# Altium PCB atWork_Remote.PcbDoc
Units mm, origin at the board's own origin, x right, y up, seen from the top; angles counter-clockwise.
Board outline 138.68 x 103 mm, 2 copper layers (Top Layer, Bottom Layer); 75 components, 79 nets, 284 pads, 95 vias.
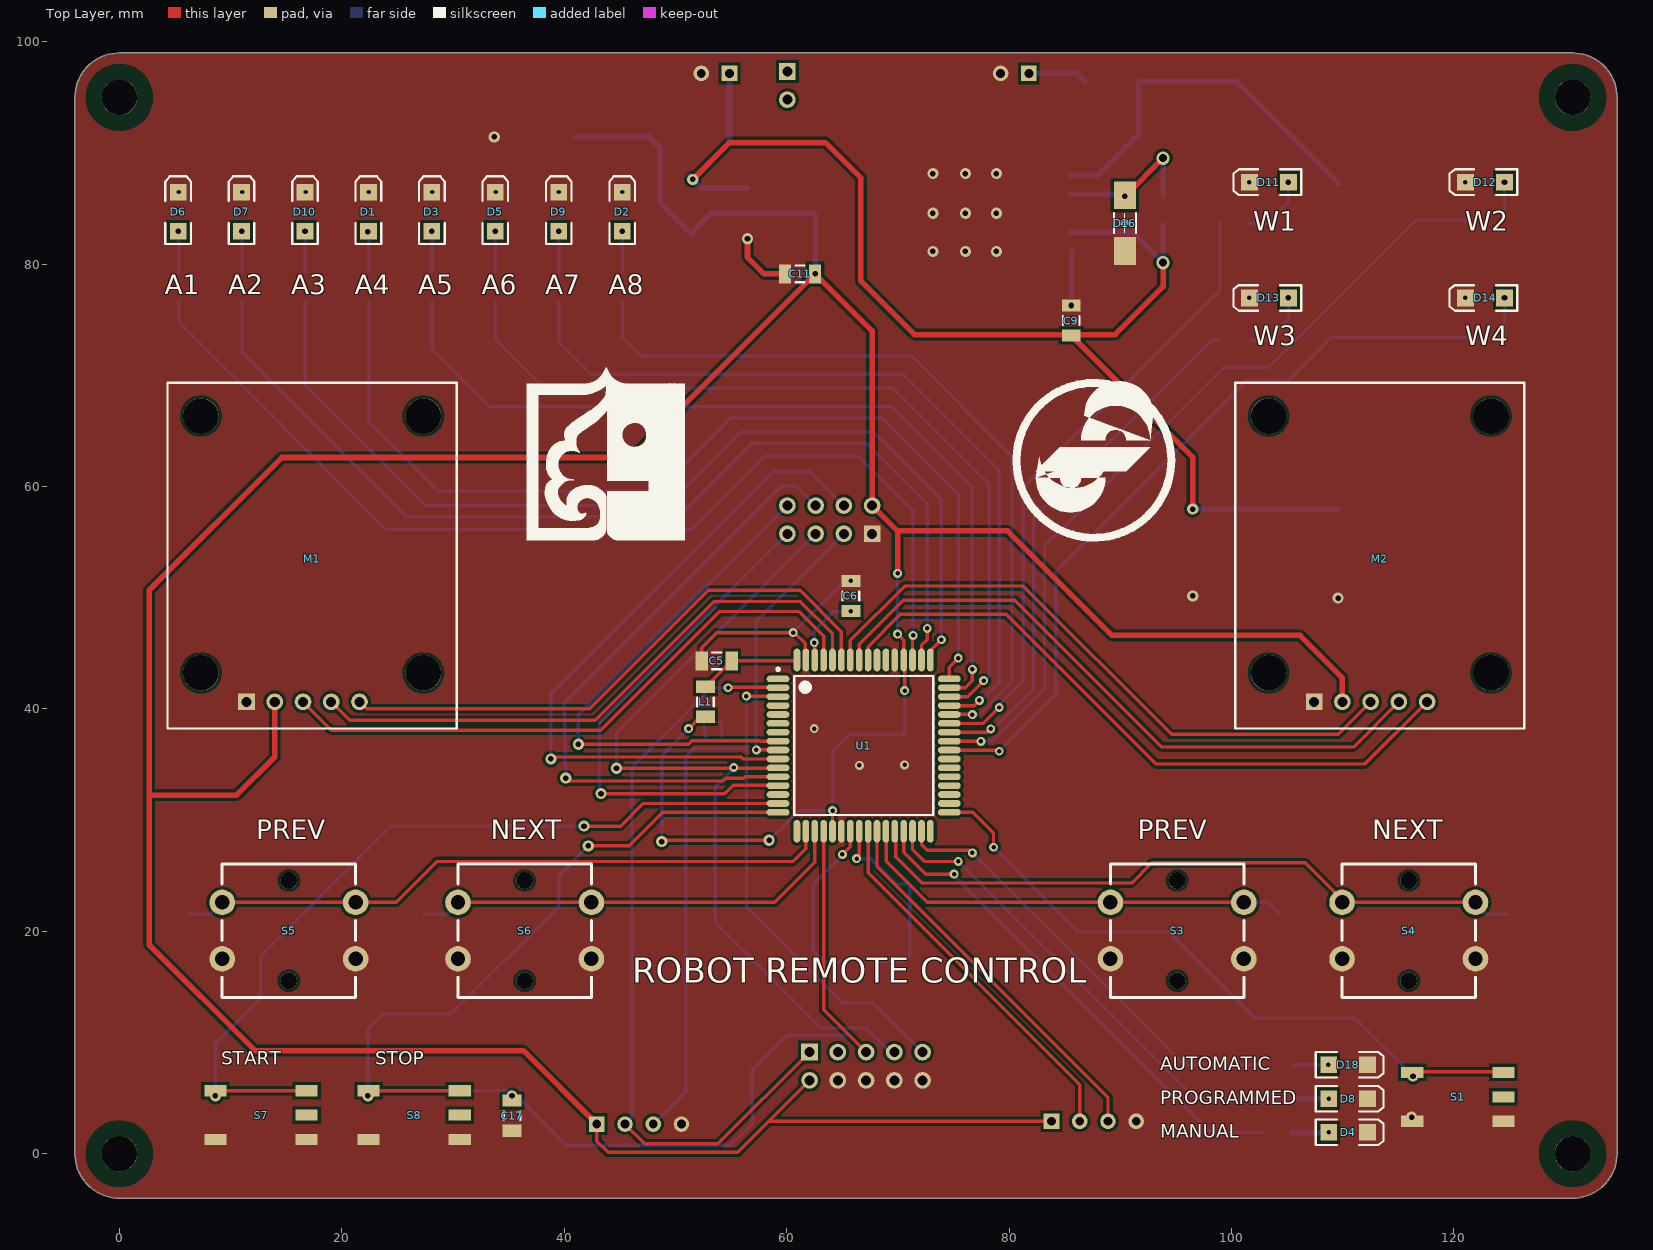
[diagram p0: Top Layer view]
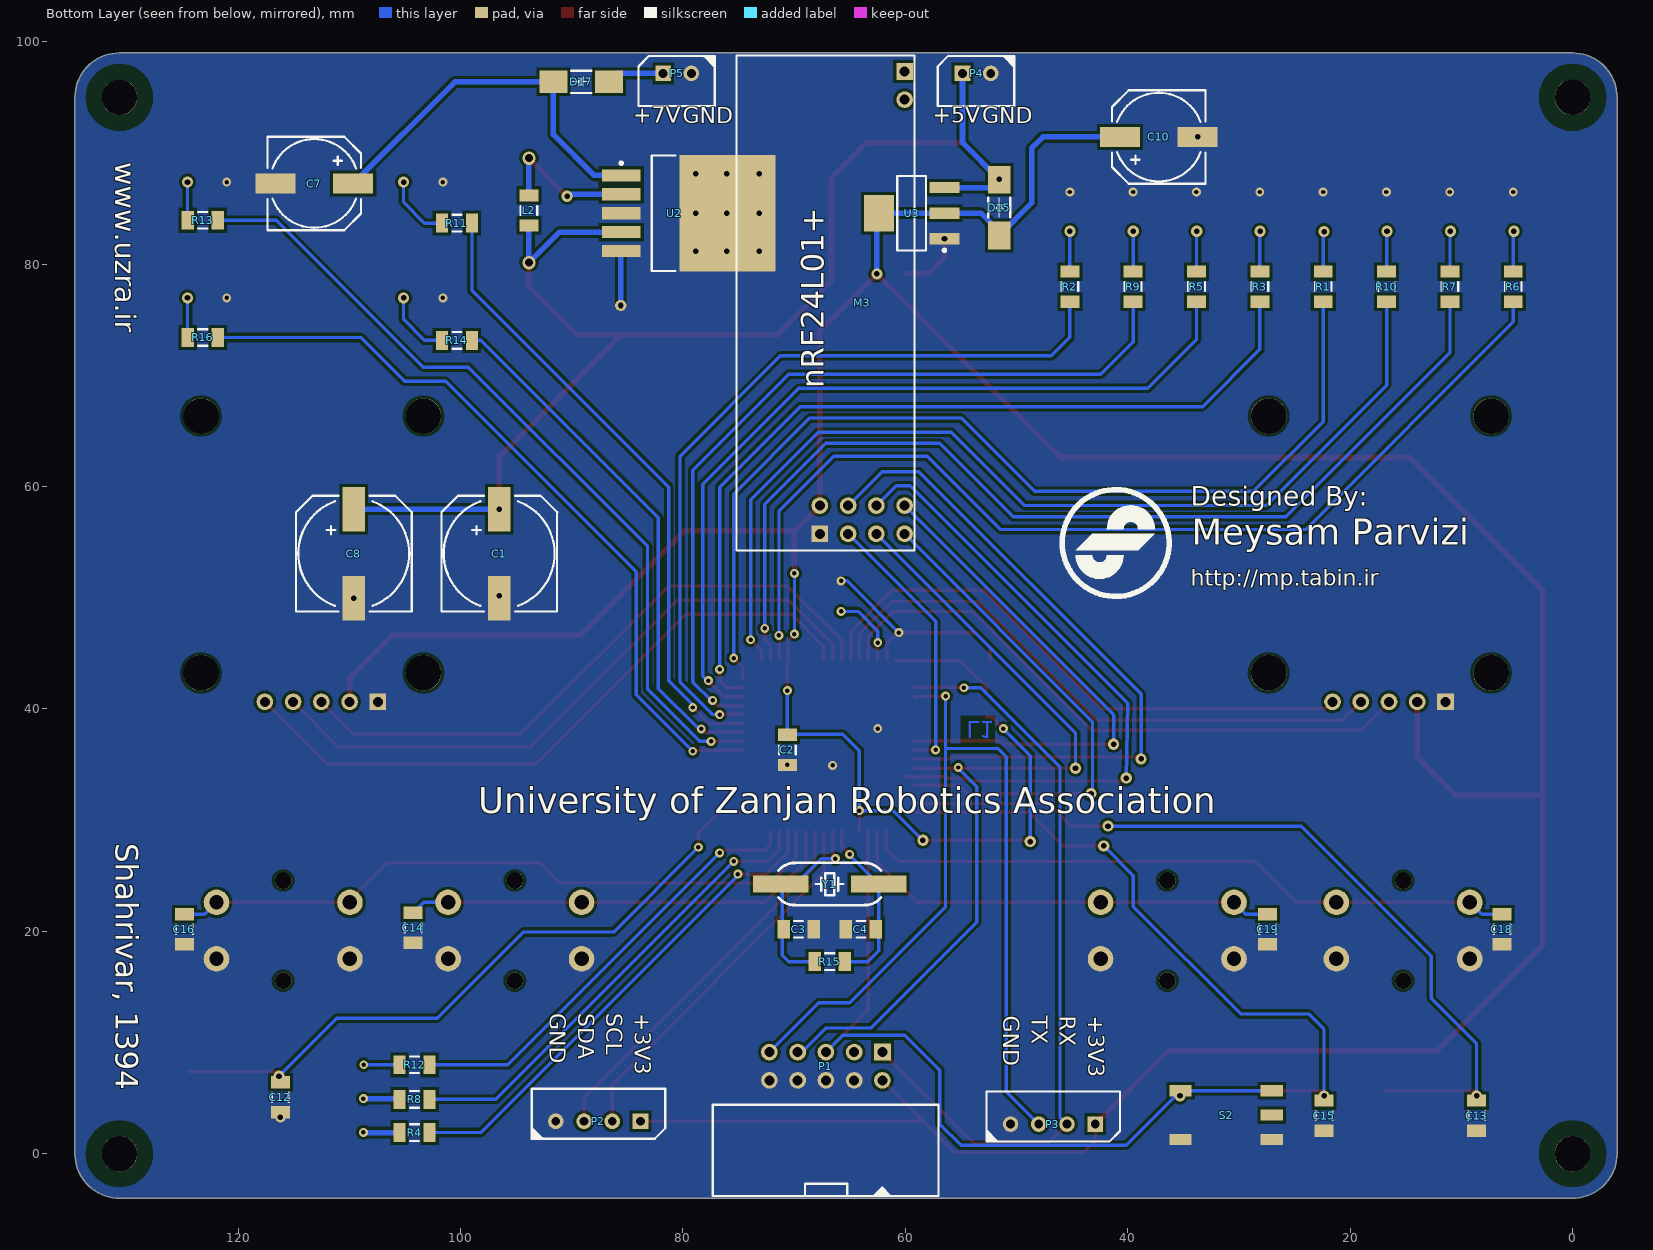
[diagram p1: Bottom Layer view, seen from below]

## Layer stack, top to bottom
Top Solder: solder mask 0.0102, Solder Resist, Dk 3.5
Top Layer: signal copper 0.0356
Dielectric 1: dielectric 0.32, FR-4, Dk 4.8
Bottom Layer: signal copper 0.0356
Bottom Solder: solder mask 0.0102, Solder Resist, Dk 3.5

## Board outline
-4,0 -4,94.996 cw(c0,94.996) 0,98.996 130.683,98.996 cw(c130.683,94.996) 134.683,94.996 134.683,0 cw(c130.683,0) 130.683,-4 0,-4 cw(c0,0)

## Design rules (kind name [scope] priority, off if disabled: settings)
Clearance [All] p1: gap=0.254
PolygonConnect [All] p1: connectstyle=Direct reliefconductorwidth=0.254 reliefentries=4 polygonreliefangle="90 Angle" airgapwidth=0.254
RoutingVias [All] p1: holewidth=0.711 width=1.27 viastyle="Through Hole" minholewidth=0.711 minwidth=1.27 maxholewidth=0.711 maxwidth=1.27
SolderMaskExpansion [All] p1: expansion=0.102
Width [All] p1: maxlimit=1 minlimit=0.254 preferedwidth=0.4 minimp=50.000000 maximp=50.000000 favimp=50.000000
30 further rules are at their usual default settings.

## Components (designator, comment, footprint, x,y, rotation, side; value= is the part's Value field where it differs from the comment)
C1 "Cap Pol1" CAP-SMD2 96.52,53.975 r90 bottom
C2 "Cap" C1206 70.612,36.322 r90 bottom
C3 "Cap" C1206 69.596,20.193 r0 bottom
C4 "Cap" C1206 64.008,20.193 r180 bottom
C5 "Cap" C1206 53.721,44.323 r0 top
C6 "Cap" C1206 65.786,50.165 r270 top
C7 "Cap Pol1" CAP-SMD1 113.157,87.249 r180 bottom
C8 "Cap Pol1" CAP-SMD2 109.601,53.975 r90 bottom
C9 "Cap" C1206 85.598,74.93 r270 top
C10 "Cap Pol1" CAP-SMD1 37.211,91.44 r0 bottom
C11 "Cap" C1206 61.214,79.121 r0 top
C12 "Cap" C1206 116.205,5.08 r270 bottom
C13 "Cap" C1206 8.636,3.429 r270 bottom
C14 "Cap" C1206 104.267,20.32 r270 bottom
C15 "Cap" C1206 22.352,3.429 r270 bottom
C16 "Cap" C1206 124.841,20.193 r270 bottom
C17 "Cap" C1206 35.306,3.429 r270 top
C18 "Cap" C1206 6.35,20.193 r270 bottom
C19 "Cap" C1206 27.432,20.193 r270 bottom
D1 "LED2" 3.2X1.6X1.1 22.394,84.709 r90 top
D2 "LED2" 3.2X1.6X1.1 45.212,84.709 r90 top
D3 "LED2" 3.2X1.6X1.1 28.098,84.709 r90 top
D4 "LED2" 3.2X1.6X1.1 110.49,1.926 r0 top
D5 "LED2" 3.2X1.6X1.1 33.803,84.709 r90 top
D6 "LED2" 3.2X1.6X1.1 5.28,84.709 r90 top
D7 "LED2" 3.2X1.6X1.1 10.985,84.709 r90 top
D8 "LED2" 3.2X1.6X1.1 110.49,4.953 r0 top
D9 "LED2" 3.2X1.6X1.1 39.507,84.709 r90 top
D10 "LED2" 3.2X1.6X1.1 16.689,84.709 r90 top
D11 "LED2" 3.2X1.6X1.1 103.378,87.376 r180 top
D12 "LED2" 3.2X1.6X1.1 122.809,87.376 r180 top
D13 "LED2" 3.2X1.6X1.1 103.378,76.962 r180 top
D14 "LED2" 3.2X1.6X1.1 122.809,76.962 r180 top
D15 "Diode 1N4007" DIODE-SMD 51.562,85.09 r90 bottom
D16 "1N5822" DIODE-SMD 90.424,83.693 r90 top
D17 "1N5822" DIODE-SMD 89.154,96.393 r0 bottom
D18 "LED2" 3.2X1.6X1.1 110.49,8.001 r0 top
L1 "Inductor" C1206 52.705,40.64 r270 top
L2 "Inductor" C1206 93.853,84.836 r270 bottom
M1 "Bigtree SJoys" BIGTREE_SJOYS 11.43,40.64 r0 top
M2 "Bigtree SJoys" BIGTREE_SJOYS 107.442,40.64 r0 top
M3 "nRF24L01+" NRF24L01+ 67.691,55.753 r90 bottom
P1 "Programmer" BOX2X5_RIGHT 67.145,6.604 r180 bottom
P2 "I2C" XH4PIN 83.82,2.921 r180 bottom
P3 "UART" XH4PIN 42.926,2.667 r180 bottom
P4 "5V Power" XH2PIN 54.864,97.155 r0 bottom
P5 "Battery Power" XH2PIN 81.788,97.155 r0 bottom
R1 "Res1" C1206 22.425,77.978 r270 bottom
R2 "Res1" C1206 45.212,77.978 r270 bottom
R3 "Res1" C1206 28.121,77.978 r270 bottom
R4 "Res1" C1206 104.14,1.905 r180 bottom
R5 "Res1" C1206 33.818,77.978 r270 bottom
R6 "Res1" C1206 5.334,77.978 r270 bottom
R7 "Res1" C1206 11.031,77.978 r270 bottom
R8 "Res1" C1206 104.14,4.889 r180 bottom
R9 "Res1" C1206 39.515,77.978 r270 bottom
R10 "Res1" C1206 16.728,77.978 r270 bottom
R11 "Res1" C1206 100.33,83.693 r180 bottom
R12 "Res1" C1206 104.14,8.001 r180 bottom
R13 "Res1" C1206 123.19,83.947 r180 bottom
R14 "Res1" C1206 100.33,73.152 r180 bottom
R15 "Res1" C1206 66.802,17.272 r180 bottom
R16 "Res1" C1206 123.19,73.406 r180 bottom
S1 "SW-PB" PUSH1 124.46,2.921 r180 top
S2 "SW-PB" PUSH1 27.051,1.27 r0 bottom
S3 "SW-PB" PUSH-OMRON 95.123,20.066 r180 top
S4 "SW-PB" PUSH-OMRON 115.951,20.066 r180 top
S5 "SW-PB" PUSH-OMRON 15.24,20.066 r180 top
S6 "SW-PB" PUSH-OMRON 36.449,20.066 r180 top
S7 "SW-PB" PUSH1 16.836,1.27 r180 top
S8 "SW-PB" PUSH1 30.607,1.27 r180 top
U1 "ATmega128A-AU" 64A_M 66.929,36.703 r0 top
U2 "LM2576S-5.0" TS5B_M 79.502,84.582 r180 bottom
U3 "LM1117MP-3.3" MP04A_M 59.436,84.582 r0 bottom
Y1 "XTAL" XTAL-SMD 66.802,24.257 r180 bottom

## Footprints (in the part's own frame and the unit in brackets; to place one, negate y for a bottom-side part, rotate by r counter-clockwise, add the part's x,y. Pads: shape width x height; smd on the part's side, far side on the other; paste and mask are expansions set on the pad)
3.2X1.6X1.1 [mm] "SMT LED; 2 Flat Leads"
  rect 1.5x1.5 smd: 1(-1.75,0) 2(1.75,0)
  silkscreen extent -2.9,-1.15 3.2,1.15
64A_M [mm] "Thin QFP, 64-Leads, Body 14x14mm, Pitch 0.8mm, IPC Low Density"
  oval 2.05x0.6 smd: 1(-7.7,6) 2(-7.7,5.2) 3(-7.7,4.4) 4(-7.7,3.6) 5(-7.7,2.8) 6(-7.7,2) 7(-7.7,1.2) 8(-7.7,0.4) 9(-7.7,-0.4) 10(-7.7,-1.2) 11(-7.7,-2) 12(-7.7,-2.8) 13(-7.7,-3.6) 14(-7.7,-4.4) 15(-7.7,-5.2) 16(-7.7,-6) 33(7.7,-6) 34(7.7,-5.2) 35(7.7,-4.4) 36(7.7,-3.6) 37(7.7,-2.8) 38(7.7,-2) 39(7.7,-1.2) 40(7.7,-0.4) 41(7.7,0.4) 42(7.7,1.2) 43(7.7,2) 44(7.7,2.8) 45(7.7,3.6) 46(7.7,4.4) 47(7.7,5.2) 48(7.7,6)
  oval 0.6x2.05 smd: 17(-6,-7.7) 18(-5.2,-7.7) 19(-4.4,-7.7) 20(-3.6,-7.7) 21(-2.8,-7.7) 22(-2,-7.7) 23(-1.2,-7.7) 24(-0.4,-7.7) 25(0.4,-7.7) 26(1.2,-7.7) 27(2,-7.7) 28(2.8,-7.7) 29(3.6,-7.7) 30(4.4,-7.7) 31(5.2,-7.7) 32(6,-7.7) 49(6,7.7) 50(5.2,7.7) 51(4.4,7.7) 52(3.6,7.7) 53(2.8,7.7) 54(2,7.7) 55(1.2,7.7) 56(0.4,7.7) 57(-0.4,7.7) 58(-1.2,7.7) 59(-2,7.7) 60(-2.8,7.7) 61(-3.6,7.7) 62(-4.4,7.7) 63(-5.2,7.7) 64(-6,7.7)
  silkscreen extent -7.82,-6.25 6.25,6.97, body extent -7,-7 7,7, height 1.2
BIGTREE_SJOYS [mm] "Dual-Axis Joystick with Button"
  round 3.2 hole 3.2: 0(-4.1,2.6) 0(-4.1,25.7) 0(15.9,2.6) 0(15.9,25.7)
  rect 1.5x1.5 hole 0.9: 1(0,0)
  round 1.5 hole 0.9: 2(2.54,0) 3(5.08,0) 4(7.62,0) 5(10.16,0)
  silkscreen extent -7.1,-2.4 18.9,28.7
BOX2X5_RIGHT [mm] "Box Header; 5x2 Position"
  rect 1.5x1.5 hole 0.9: 1(5.08,2.54)
  round 1.5 hole 0.9: 2(5.08,0) 3(2.54,2.54) 4(2.54,0) 5(0,2.54) 6(0,0) 7(-2.54,2.54) 8(-2.54,0) 9(-5.08,2.54) 10(-5.08,0)
  silkscreen extent -10.18,-10.39 10.12,-2.19, body extent -10.18,-10.39 10.12,-2.19, height 9
C1206 [mm] "Chip Capacitor, Body 3.2x1.6mm, IPC High Density"
  rect 1.1x1.7 smd: 1(-1.35,0) 2(1.35,0)
  silkscreen extent -0.4,-0.75 0.4,0.75, body extent -1.7,-0.9 1.7,0.9, height 1.3
CAP-SMD1 [mm] "SMD Electrolyte Capacitor; 2 Leads; 100uF; 25V"
  rect 3.6x1.8 smd: 1(3.5,0) 2(-3.5,0)
  silkscreen extent -4.2,-4.2 4.2,4.2
CAP-SMD2 [mm] "SMD Electrolyte Capacitor; 2 Leads; 100uF; 50V"
  rect 4x2 smd: 1(4,0) 2(-4,0)
  silkscreen extent -5.2,-5.21 5.2,5.21
DIODE-SMD [mm] "1N5822; SS34 Schottkey Diode"
  rect 2.5x2 smd: 1(-2.5,0) 2(2.5,0)
  silkscreen extent -0.9,-0.99 0.9,0.99
MP04A_M [mm] "SOT223, 4-Leads, Body 6.5x3.5mm, Pitch 2.3mm, Lead Span 7mm, IPC Low Density"
  rect 2.7x1 smd: 1(-2.95,2.3) 2(-2.95,0) 3(-2.95,-2.3)
  rect 2.7x3.3 smd: 4(2.95,0)
  silkscreen extent -3.07,-3.35 1.3,3.47, body extent -1.85,-3.35 1.85,3.35, height 1.8
NRF24L01+ [mm] "nRF24L01 Single Chip 2.4GHz Tranceiver, +PA +LNA Ver5.1"
  round 1.5 hole 0.9: 0(39.04,-7.62) 2(2.54,0) 3(0,-2.54) 4(2.54,-2.54) 5(0,-5.08) 6(2.54,-5.08) 7(0,-7.62) 8(2.54,-7.62)
  rect 1.5x1.5 hole 0.9: 0(41.58,-7.62) 1(0,0)
  silkscreen extent -1.5,-8.5 43,7.5
PUSH1 [mm] "SMD Push Button; Arduino Uno Reset Button"
  rect 2x1 smd: 0(0,-2.2) 1(0,0) 1(8.2,0) 2(0,-4.4) 2(8.2,-4.4)
PUSH-OMRON [mm] "Push Button"
  round 1.5 hole 1.5: 0(0,4.5) 0(0,-4.5)
  round 2.3 hole 1.3: 1(-6,2.54) 1(6,2.54) 2(-6,-2.54) 2(6,-2.54)
  silkscreen extent -6,-6 6,6
TS5B_M [mm] "D2-PAK, 6-Leads, Body 8.6x10.2mm, Pitch 1.7mm, Lead Span 14.1mm, IPC Low Density"
  rect 3.5x1.1 smd: 1(-6.05,3.4) 2(-6.05,1.7) 3(-6.05,0) 4(-6.05,-1.7) 5(-6.05,-3.4)
  rect 8.6x10.5 smd: 6(3.5,0)
  silkscreen extent -6.18,-5.2 -1.2,5.2, body extent -3.3,-5.2 6.1,5.2, height 4.65
XH2PIN [mm] "XH 2 Pin Connector"
  rect 1.4x1.4 hole 0.8: 1(0,0)
  round 1.4 hole 0.8: 2(-2.54,0)
  silkscreen extent -4.65,-1.57 2.22,2.93
XH4PIN [mm] "XH 4 Pin Connector"
  rect 1.4x1.4 hole 0.8: 1(0,0)
  round 1.4 hole 0.8: 2(-2.54,0) 3(-5.08,0) 4(-7.62,0)
  silkscreen extent -9.78,-1.57 2.22,2.93
XTAL-SMD [mm] "Crystal, SMT, 2 Leads"
  rect 5x1.5 smd: 1(-4.394,0) 2(4.394,0)
  silkscreen extent -4.6,-1.91 4.6,1.91

## Part data
C1 C7 C8 C10: "Polarized Capacitor (Radial)"
C2 C3 C4 C5 C6 C9 C11 C12 C13 C14 C15 C16 C17 C18 C19: "Capacitor"
D1 D2 D3 D4 D5 D6 D7 D8 D9 D10 D11 D12 D13 D14 D18: "Typical RED, GREEN, YELLOW, AMBER GaAs LED"
D15: "1 Amp General Purpose Rectifier"
D16 D17: library part Diode, "Default Diode"
M1 M2: "Dual-Axis Joystick with Button"
M3: "nRF24L01 Single Chip 2.4GHz Tranceiver, +PA +LNA Ver5.1"
P1: library part "Box 5X2", "Box, 5-Pin, Dual row"
P2 P3: library part "Header 4", "Header, 4-Pin"
P4 P5: library part "Header 2", "Header, 2-Pin"
R1 R2 R3 R4 R5 R6 R7 R8 R9 R10 R11 R12 R13 R14 R15 R16: "Resistor"
S1 S2 S3 S4 S5 S6 S7 S8: "Switch"
U1: "8-bit AVR Microcontroller, 128KB Flash, 4KB EEPROM, 4KB SRAM, 64-pin TQFP, Industrial Grade (-40°C to 85°C)"
U2: "SIMPLE SWITCHER® 3A Step-Down Voltage Regulator, 5-pin TO-263"
U3: "800mA Low-Dropout Linear Regulator, 4-pin SOT-223"
Y1: "Crystal Oscillator"

## Free pads (board coordinates)
  round 3.2 hole 3.2: 0(0,0) 0(0,94.996) 0(130.683,0) 0(130.683,94.996)

## Via types
v1: diameter 0.8, hole 0.4, Top Layer to Bottom Layer, 48 vias
v2: diameter 1, hole 0.5, Top Layer to Bottom Layer, 44 vias
v3: diameter 1.2, hole 0.7, Top Layer to Bottom Layer, 2 vias
v4: diameter 0.8, hole 0.4, Top Layer to Bottom Layer, tented bottom, 1 vias

## Nets (pads, with @x,y where several pads share a name; then routed paths per layer and width w, separated by ;. In a path a pad name is that pad's centre, name@x,y a point inside that pad or via, vN(x,y) a via of type N, cw(c..) or ccw(c..) an arc to the next point about the centre after c; other vN are vias at no path point)
3V3: C2.2 C10.1 C11.2 D15.1 L1.2 M1.2 M2.2 M3.2 P1.2 P2.1 P3.1 U1.21 U1.52 U3.2 U3.4 | length 387.9
  Top Layer w0.3: P3.1 42.926,1.143 43.942,0.127 55.588,0.127 P1.2 ; v2(48.768,28.067) 48.768,28.321 48.895,28.194 v2(58.42,28.194) ; v1(51.181,38.227) 52.244,39.29 L1.2 ; 58.458,2.921 P2.1 ; U1.21 v1@64.129,30.855 ; v1(69.977,46.736) 70.529,46.184 U1.52 ; U1.52@70.485,44.359 70.612,44.232 v4(70.612,41.656)
  Top Layer w0.5: M1.2 13.97,35.687 10.541,32.258 2.667,32.258 ; P3.1 36.322,9.271 12.192,9.271 2.667,18.796 2.667,32.258 ; v1(69.977,52.197) 69.977,56.007 ; M2.2 109.982,42.799 106.172,46.609 89.281,46.609 79.883,56.007 69.977,56.007 ; 2.667,32.258 2.667,50.673 14.605,62.611 46.054,62.611 v2(62.564,79.121) 67.691,73.994 M3.2 69.977,56.007
  Bottom Layer w0.3: v2(48.768,28.067) 48.768,35.814 v1(51.181,38.227) ; v2(58.42,28.194) 61.087,30.861 v1(64.135,30.861) 64.135,36.242 65.612,37.719 C2.2@70.485,37.719 ; v1(69.977,46.736) v1(69.977,52.197) ; C2.2@70.485,37.799 70.612,37.926 v4(70.612,41.656)
  Bottom Layer w0.5: C10.1@41.021,91.44 47.625,91.44 48.641,90.424 48.641,85.511 D15.1 51.562,82.931 53.213,84.582 U3.2 U3.4 ; v2(62.564,79.121) U3.4@62.564,84.404
5V: C1.1 C8.1 C9.2 D15.2 L2.2 P4.1 U2.4 U3.3 | length 122.8
  Top Layer w0.5: v2(51.562,87.63) 54.864,90.932 63.5,90.932 66.675,87.757 66.675,78.486 71.501,73.66 89.535,73.66 93.853,77.978 v3(93.853,80.137) ; C9.2 96.52,62.658 v2(96.52,57.975)
  Bottom Layer w0.5: D15.2@51.181,87.971 D15.2 52.27,86.882 U3.3 ; v2(51.562,87.63) 54.864,90.932 P4.1 ; U2.4 91.108,82.882 v3(93.853,80.137) L2.2 ; v2(96.52,57.975) C8.1
ADC0: M1.3 U1.61 | length 55.3
  Top Layer w0.3: M1.3 19.05,38.1 43.307,38.1 53.975,48.768 61.087,48.768 63.329,46.526 U1.61
ADC1: M1.4 U1.60 | length 53.7
  Top Layer w0.3: M1.4 20.701,38.989 42.799,38.989 53.467,49.657 61.214,49.657 64.129,46.742 U1.60
ADC2: M1.5 U1.59 | length 52.1
  Top Layer w0.3: M1.5 22.225,40.005 42.291,40.005 52.959,50.673 61.214,50.673 64.929,46.958 U1.59
ADC3: M2.3 U1.58 | length 57.3
  Top Layer w0.3: U1.58 65.729,46.171 70.612,51.054 81.28,51.054 94.615,37.719 109.601,37.719 M2.3
ADC4: M2.4 U1.57 | length 58.8
  Top Layer w0.3: U1.57 66.529,45.828 70.485,49.784 80.518,49.784 93.726,36.576 110.998,36.576 M2.4
ADC5: M2.5 U1.56 | length 60.6
  Top Layer w0.3: U1.56 67.329,45.612 70.231,48.514 79.756,48.514 93.218,35.052 112.014,35.052 M2.5
ADC6: U1.55
ADC7: U1.54
CE: M3.3 U1.9 | length 24.6
  Top Layer w0.3: v1(57.277,36.322) U1.9@59.21,36.322
  Bottom Layer w0.3: v1(57.277,36.322) 57.277,47.879 M3.3
GND: C1.2 C2.1 C3.1 C4.1 C5.1 C6.1 C7.2 C8.2 C9.1 C10.2 C11.1 C12.2 C13.2 C14.2 C15.2 C16.2 C17.2 C18.2 C19.2 D1.2 D2.2 D3.2 D4.2 D5.2 D6.2 D7.2 D8.2 D9.2 D10.2 D11.2 D12.2 D13.2 D14.2 D16.1 D18.2 M1.1 M2.1 M3.1 P1.4 P1.6 P1.8 P1.10 P2.4 P3.4 P4.2 P5.2 S1.1 S2.1 S3.1 S4.1 S5.1 S6.1 S7.1 S8.1 U1.22 U1.53 U1.63 U2.3 U2.5 U2.6 U3.1 | length 30.6
  Top Layer w0.3: C5.1 52.371,45.513 53.721,46.863 v1(60.579,46.863) 60.706,46.863 61.68,45.889 61.68,44.452 U1.63
  Top Layer w0.5: v2(56.486,82.282) 56.486,80.616 57.981,79.121 C11.1
  Bottom Layer w0.3: v1(60.579,46.863) 65.231,51.515 v1(65.786,51.515)
  Bottom Layer w0.5: v2(85.598,76.28) U2.5@85.598,81.136
  other v1: 66.548,34.925 70.612,34.972 62.484,38.227 101.6,76.962 121.031,76.962 5.334,86.487 11.049,86.487 16.743,86.487 22.437,86.487 28.13,86.487 33.824,86.487 39.518,86.487 45.212,86.487 101.6,87.376 121.031,87.376
  other v2: 116.205,3.302 109.601,49.975 96.52,50.165 73.152,81.153 76.073,81.153 78.867,81.153 73.152,84.582 76.073,84.582 78.867,84.582 73.152,88.138 76.073,88.138 78.867,88.138 33.711,91.44
IRQ: M3.8 U1.8 | length 47.3
  Top Layer w0.3: v2(41.275,36.83) 51.181,36.83 51.477,37.126 57.61,37.126 57.633,37.103 U1.8
  Bottom Layer w0.3: v2(41.275,36.83) 41.275,39.497 M3.8
MISO: M3.7 U1.13 | length 46.7
  Top Layer w0.3: v2(43.307,32.385) 54.422,32.385 55.184,33.147 59.185,33.147 U1.13
  Bottom Layer w0.3: v2(43.307,32.385) 43.18,32.512 43.18,38.862 M3.7
MOSI: M3.6 U1.12 | length 58.4
  Top Layer w0.3: v2(40.138,33.776) 40.386,33.528 54.303,33.528 54.551,33.776 56.134,33.776 56.261,33.903 U1.12 U1.12@60.118,33.903
  Bottom Layer w0.3: v2(40.138,33.776) 40.011,40.519 59.563,60.071 60.833,60.071 M3.6
NetC3_2: C3.2 R15.1 U1.24 Y1.1 | length 17.8
  Top Layer w0.3: v1(66.294,26.543) 66.529,26.778 U1.24
  Bottom Layer w0.3: v1(66.294,26.543) 67.564,26.543 69.85,24.257 70.993,24.257 71.073,24.177 71.073,17.86 70.485,17.272 R15.1
NetC4_2: C4.2 R15.2 U1.23 Y1.2 | length 15.7
  Top Layer w0.3: v1(65.024,26.924) 65.729,27.629 U1.23
  Bottom Layer w0.3: v1(65.024,26.924) 65.075,26.924 Y1.2 62.404,24.253 62.404,18.241 63.373,17.272 R15.2
NetC5_2: C5.2 L1.1 U1.64 | length 9.5
  Top Layer w0.3: L1.1@52.705,41.736 52.705,41.957 C5.2 60.849,44.323 U1.64
NetC6_2: C6.2 U1.62 | length 6.6
  Top Layer w0.3: U1.62 v1@62.529,45.929
  Bottom Layer w0.3: v1(62.484,45.974) 62.484,46.99 64.262,48.768 v1(65.786,48.768)
NetD1_1: D1.1 R1.1 | length 3.6
  Bottom Layer w0.3: R1.1 v2@22.425,82.931
  other v2: 22.352,82.931
NetD2_1: D2.1 R2.1 | length 3.6
  Bottom Layer w0.3: R2.1 v2(45.212,82.959)
NetD3_1: D3.1 R3.1 | length 3.6
  Bottom Layer w0.3: R3.1 v2@28.121,82.936
  other v2: 28.098,82.959
NetD4_1: D4.1 R4.1 | length 3.3
  Bottom Layer w0.5: R4.1 v1@108.74,1.905
  other v1: 108.74,1.926
NetD5_1: D5.1 R5.1 | length 3.6
  Bottom Layer w0.3: R5.1 v2@33.818,82.944
  other v2: 33.803,82.959
NetD6_1: D6.1 R6.1 | length 3.6
  Bottom Layer w0.3: R6.1 v2@5.334,82.905
  other v2: 5.28,82.959
NetD7_1: D7.1 R7.1 | length 3.6
  Bottom Layer w0.3: R7.1 v2@11.031,82.913
  other v2: 10.985,82.959
NetD8_1: D8.1 R8.1 | length 3.4
  Bottom Layer w0.5: R8.1@105.363,4.949 v1@108.74,4.949
  other v1: 108.74,4.953
NetD9_1: D9.1 R9.1 | length 3.6
  Bottom Layer w0.3: R9.1 v2@39.515,82.951
  other v2: 39.507,82.959
NetD10_1: D10.1 R10.1 | length 3.6
  Bottom Layer w0.3: R10.1 v2@16.728,82.92
  other v2: 16.689,82.959
NetD11_1: D11.1 R11.1 | length 6
  Bottom Layer w0.3: R11.1 103.251,83.693 105.128,85.57 v2(105.128,87.376)
NetD12_1: D12.1 R13.1 | length 3.4
  Bottom Layer w0.3: R13.1@124.559,83.966 v2(124.559,87.376)
NetD13_1: D13.1 R14.1 | length 6.2
  Bottom Layer w0.3: R14.1 103.251,73.152 105.128,75.029 v2(105.128,76.962)
NetD14_1: D14.1 R16.1 | length 3.5
  Bottom Layer w0.3: R16.1@124.559,73.425 v2(124.559,76.962)
NetD16_2: D16.2 L2.1 U2.2 | length 12.9
  Top Layer w0.5: D16.2@90.511,86.193 v3(93.853,89.535) v3@93.766,89.535
  Bottom Layer w0.5: U2.2 v2@90.248,86.282 ; L2.1 v3(93.853,89.535)
  other v2: 90.424,86.106
NetD17_1: D17.1 P5.1 | length 5.4
  Bottom Layer w0.5: P5.1 86.106,97.155 D17.1@86.868,96.393
NetD18_1: D18.1 R12.1 | length 3.2
  Bottom Layer w0.3: R12.1 v1(108.712,8.001)
PA0: R6.2 U1.51 | length 93.7
  Top Layer w0.3: U1.51 v1@71.329,46.564
  Bottom Layer w0.3: R6.2 5.334,74.803 24.003,56.134 51.435,56.134 58.039,62.738 66.421,62.738 71.374,57.785 v1(71.374,46.609)
PA1: R7.2 U1.50 | length 91.6
  Top Layer w0.3: U1.50 72.129,45.713 72.644,46.228 v1(72.644,47.244)
  Bottom Layer w0.3: R7.2 11.031,72.027 25.781,57.277 50.292,57.277 56.896,63.881 67.183,63.881 72.644,58.42 v1(72.644,47.244)
PA2: R10.2 U1.49 | length 89.2
  Top Layer w0.3: U1.49 72.929,45.243 v1(73.914,46.228)
  Bottom Layer w0.3: R10.2 16.728,69.124 27.559,58.293 49.276,58.293 55.88,64.897 67.818,64.897 73.914,58.801 v1(73.914,46.228)
PA3: R1.2 U1.48 | length 88.9
  Top Layer w0.3: U1.48 74.629,43.768 v1(75.438,44.577)
  Bottom Layer w0.3: R1.2 22.425,65.84 28.702,59.563 48.387,59.563 54.991,66.167 68.58,66.167 75.438,59.309 v1(75.438,44.577)
PA4: R3.2 U1.47 | length 77.8
  Top Layer w0.3: U1.47 76.066,41.903 76.708,42.545 v1(76.708,43.561)
  Bottom Layer w0.3: R3.2 28.121,72.336 33.274,67.183 69.469,67.183 76.708,59.944 v1(76.708,43.561)
PA5: R5.2 U1.46 | length 75
  Top Layer w0.3: U1.46 76.282,41.103 v1(77.724,42.545)
  Bottom Layer w0.3: R5.2 33.818,73.243 38.227,68.834 69.596,68.834 78.232,60.198 78.232,42.926 77.724,42.418 v1(77.724,42.545)
PA6: R9.2 U1.45 | length 72.6
  Top Layer w0.3: U1.45 76.879,40.303 v1(77.343,40.767)
  Bottom Layer w0.3: R9.2 39.515,73.007 42.418,70.104 70.485,70.104 79.121,61.468 79.121,42.418 77.343,40.64 v1(77.343,40.767)
PA7: R2.2 U1.44 | length 69.9
  Top Layer w0.3: U1.44 74.629,39.539 v1@76.666,39.539
  Bottom Layer w0.3: R2.2 45.212,73.406 46.863,71.755 71.247,71.755 80.264,62.738 80.264,42.418 77.343,39.497 v1(76.708,39.497)
PB4: U1.14
PB7: U1.17
PC0: U1.35
PC1: U1.36
PC2: U1.37
PC3: U1.38
PC4: U1.39
PC5: R16.2 U1.40 | length 69
  Top Layer w0.3: U1.40 74.629,36.28 v1@79.036,36.28
  Bottom Layer w0.3: v1(79.121,36.195) 84.201,41.275 84.201,52.324 101.346,69.469 105.029,69.469 108.966,73.406 R16.2
PC6: R13.2 U1.41 | length 74.1
  Top Layer w0.3: U1.41 v1@77.451,37.103
  Bottom Layer w0.3: v1(77.47,37.084) 78.486,37.084 83.185,41.783 83.185,54.61 99.314,70.739 103.378,70.739 116.586,83.947 R13.2
PC7: R14.2 U1.42 | length 48
  Top Layer w0.3: U1.42 78.056,37.903 v1(78.359,38.206)
  Bottom Layer w0.3: v1(78.359,38.206) 78.592,38.206 82.215,41.829 82.215,57.196 98.171,73.152 R14.2
PD2: C14.1 S3.2 U1.27 | length 39.9
  Top Layer w0.3: U1.27@68.961,28.971 68.961,26.289 72.644,22.606 89.123,22.606 S3.2@101.123,22.606
  Bottom Layer w0.3: S3.2@101.123,22.606 103.331,22.606 C14.1
PD3: C16.1 S4.2 U1.28 | length 61.3
  Top Layer w0.3: U1.28 69.825,28.907 69.825,26.695 72.178,24.342 91.017,24.342 92.837,26.162 106.649,26.162 S4.2@110.205,22.606 ; S4.2@109.951,22.606 S4.2@110.205,22.606 ; S4.2@121.951,22.606 S4.2@110.205,22.606
  Bottom Layer w0.3: S4.2@121.951,22.606 123.014,21.543 C16.1
PD4: R4.2 U1.29 | length 44.7
  Top Layer w0.3: U1.29 70.529,27.134 72.517,25.146 v1(75.057,25.146)
  Bottom Layer w0.3: v1(75.057,25.146) 75.057,25.019 98.171,1.905 R4.2
PD5: R8.2 U1.30 | length 42.4
  Top Layer w0.3: U1.30 71.329,27.35 72.39,26.289 v1(75.438,26.289)
  Bottom Layer w0.3: v1(75.438,26.289) 96.837,4.889 R8.2
PD6: R12.2 U1.31 | length 40.1
  Top Layer w0.3: U1.31 72.129,27.82 72.644,27.305 76.454,27.305 v1(76.708,27.051)
  Bottom Layer w0.3: v1(76.708,27.051) 95.758,8.001 R12.2
PD7: U1.32
PDI: P1.1 P3.2 U1.2 | length 69.3
  Top Layer w0.3: P3.2 47.244,0.889 53.81,0.889 P1.1 ; v1(54.737,41.91) 54.779,41.952 59.18,41.952 U1.2
  Bottom Layer w0.3: P3.2 46.101,3.302 46.101,34.798 53.213,41.91 v1(54.737,41.91)
PDO: P1.9 P3.3 U1.3 | length 83.1
  Top Layer w0.3: v1(56.388,41.148) 58.93,41.148 59.057,41.021 U1.3@59.184,41.148
  Bottom Layer w0.3: P3.3 50.927,5.588 50.927,35.687 51.689,36.449 51.699,36.439 54.917,36.439 ; 54.927,36.449 56.388,36.449 ; v1(56.388,41.148) 56.388,36.449 ; P1.9 67.78,13.589 65.024,13.589 56.388,22.225 56.388,36.449
PE2: U1.4
PE3: U1.5
PE4: U1.6
PE5: U1.7
PG0: C12.1 S1.2 U1.33 | length 61.1
  Top Layer w0.3: U1.33 76.739,30.703 78.613,28.829 v1(78.613,27.559) ; v2(116.332,6.985) 116.713,7.366 S1.2@124.415,7.366
  Bottom Layer w0.3: v1(78.613,27.559) 86.233,19.939 94.361,19.939 102.108,12.192 111.125,12.192 C12.1@116.586,6.731 ; v2(116.332,6.985) v2@116.332,7.239
PG1: U1.34
PG2: R11.2 U1.43 | length 56.8
  Top Layer w0.3: U1.43 74.639,38.693 77.682,38.693 v1(79.121,40.132)
  Bottom Layer w0.3: v1@78.994,40.259 81.28,42.545 81.28,59.944 98.98,77.644 R11.2
PG3: C18.1 S5.2 U1.18 | length 59.4
  Top Layer w0.3: S5.2@9.24,22.606 21.24,22.606 24.892,22.606 28.575,26.289 60.579,26.289 61.729,27.439 U1.18
  Bottom Layer w0.3: C18.1 8.177,21.543 S5.2@9.24,22.606
PG4: C19.1 S6.2 U1.19 | length 39.8
  Top Layer w0.3: S6.2@30.449,22.606 42.449,22.606 58.928,22.606 62.529,26.207 U1.19
  Bottom Layer w0.3: C19.1 29.386,21.543 S6.2@30.449,22.606
RESET: C17.1 P1.5 S2.2 U1.20 | length 71.1
  Top Layer w0.3: U1.20 63.329,12.96 P1.5
  Bottom Layer w0.3: S2.2@27.051,5.67 35.251,5.67 40.159,0.762 54.991,0.762 56.896,2.667 56.896,7.493 60.071,10.668 65.621,10.668 P1.5
  other v2: 35.306,5.207
SCK: M3.5 P1.7 U1.11 | length 78.6
  Top Layer w0.3: v2(44.704,34.671) 55.245,34.671 59.197,34.671 U1.11
  Bottom Layer w0.3: v2(44.704,34.671) 44.704,37.846 M3.5 ; v1(55.245,34.734) 55.245,34.671 53.594,33.02 53.594,20.828 63.119,11.303 67.183,11.303 69.342,9.144 P1.7
SCL: P2.2 U1.25 | length 34
  Top Layer w0.3: U1.25 67.329,25.254 86.36,6.223 P2.2
SDA: P2.3 U1.26 | length 34.7
  Top Layer w0.3: U1.26 68.129,25.851 88.9,5.08 P2.3
SS: M3.4 U1.10 | length 62.3
  Top Layer w0.3: v2(38.805,35.503) 38.989,35.687 55.88,35.687 56.064,35.503 U1.10
  Bottom Layer w0.3: v2(38.805,35.503) 38.805,41.345 58.801,61.341 62.103,61.341 M3.4
START: C13.1 S7.2 U1.15 | length 74.7
  Top Layer w0.3: S7.2@8.636,5.67 S7.2@16.836,5.67 ; v2(41.783,29.464) 45.085,29.464 47.124,31.503 U1.15
  Bottom Layer w0.3: v2(8.636,5.207) 8.636,9.906 12.7,13.97 12.7,17.78 24.384,29.464 v2(41.783,29.464)
STOP: C15.1 S8.2 U1.16 | length 60.8
  Top Layer w0.3: S8.2@22.407,5.67 S8.2@30.607,5.67 ; v2(42.164,27.686) 45.847,27.686 48.864,30.703 U1.16
  Bottom Layer w0.3: v2(22.352,5.207) 22.352,11.176 23.749,12.573 29.845,12.573 39.497,22.225 39.497,25.019 v2(42.164,27.686)
VIN: C7.1 D17.2 U2.1 | length 34.2
  Bottom Layer w0.5: U2.1 87.982,87.982 91.654,91.654 D17.2 100.513,96.393 C7.1
pads on no net: M1.0 M2.0 M3.0 P1.3 S1.0 S2.0 S3.0 S4.0 S5.0 S6.0 S7.0 S8.0 U1.1

## Polygon pours and split planes (outlines as drawn)
GND on Top Layer "Mechanical 1-No Net" (solid, pour order 4): -4,0 -4,94.996 cw(c0,94.996) 0,98.996 130.683,98.996 cw(c130.683,94.996) 134.683,94.996 134.683,0 cw(c130.683,0) 130.683,-4 0,-4 cw(c0,0)
GND on Bottom Layer "Mechanical 1-No Net" (solid, pour order 2): -4,0 -4,94.996 cw(c0,94.996) 0,98.996 130.683,98.996 cw(c130.683,94.996) 134.683,94.996 134.683,0 cw(c130.683,0) 130.683,-4 0,-4 cw(c0,0)

## Other copper
Top Layer:
  pour cut-out: 3.009,0 cw(c0,0) 0,-3.009 cw(c0,0) -3.009,0 cw(c0,0) 0,3.009 cw(c0,0)
  pour cut-out: 130.683,3.009 cw(c130.683,0) 133.692,0 cw(c130.683,0) 130.683,-3.009 cw(c130.683,0) 127.674,0 cw(c130.683,0)
  pour cut-out: 127.674,94.996 cw(c130.683,94.996) 130.683,98.005 cw(c130.683,94.996) 133.692,94.996 cw(c130.683,94.996) 130.683,91.987 cw(c130.683,94.996)
  pour cut-out: 0,91.987 cw(c0,94.996) -3.009,94.996 cw(c0,94.996) 0,98.005 cw(c0,94.996) 3.009,94.996 cw(c0,94.996)
Bottom Layer:
  pour cut-out: 3.009,0 cw(c0,0) 0,-3.009 cw(c0,0) -3.009,0 cw(c0,0) 0,3.009 cw(c0,0)
  pour cut-out: 130.683,3.009 cw(c130.683,0) 133.692,0 cw(c130.683,0) 130.683,-3.009 cw(c130.683,0) 127.674,0 cw(c130.683,0)
  pour cut-out: 127.674,94.996 cw(c130.683,94.996) 130.683,98.005 cw(c130.683,94.996) 133.692,94.996 cw(c130.683,94.996) 130.683,91.987 cw(c130.683,94.996)
  pour cut-out: 0,91.987 cw(c0,94.996) -3.009,94.996 cw(c0,94.996) 0,98.005 cw(c0,94.996) 3.009,94.996 cw(c0,94.996)

## Silkscreen, mask and mechanical layers (free items; w line width, h text height)
Top Overlay:
  drawing of 2362 lines, arcs and shapes, not listed
  text "W1" at 101.981,82.423 h3
  text "W2" at 121.031,82.423 h3
  text "A1" at 4.064,76.708 h3
  text "A2" at 9.769,76.708 h3
  text "A3" at 15.474,76.708 h3
  text "A4" at 21.179,76.708 h3
  text "A5" at 26.884,76.708 h3
  text "A6" at 32.589,76.708 h3
  text "A7" at 38.294,76.708 h3
  text "A8" at 43.999,76.708 h3
  text "W3" at 101.981,72.136 h3
  text "W4" at 121.031,72.136 h3
  text "PREV" at 12.319,27.686 h3
  text "NEXT" at 33.401,27.686 h3
  text "PREV" at 91.567,27.686 h3
  text "NEXT" at 112.649,27.686 h3
  text "ROBOT REMOTE CONTROL" at 46.101,14.605 h3.8
  text "START" at 9.144,7.62 h2.1
  text "STOP" at 22.987,7.62 h2.1
  text "AUTOMATIC" at 93.599,7.112 h2.1
  text "PROGRAMMED" at 93.599,4.064 h2.1
  text "MANUAL" at 93.599,1.016 h2.1
Bottom Overlay:
  circle w0.496: c41.088,54.927 r4.804
  region: 44.684,54.258 43.189,55.753 37.583,55.753 39.078,54.258
  region: 37.584,56.173 cw(c39.733,56.173) 41.882,56.173 40.387,56.173 ccw(c39.733,56.173) 39.079,56.173
  region: 44.683,53.837 cw(c42.534,53.837) 40.385,53.837 41.88,53.837 ccw(c42.534,53.837) 43.188,53.837
  text "+5V" at 57.531,92.202 h2.5
  text "+7V" at 84.455,92.202 h2.5
  text "GND" at 53.086,92.18 h2.5
  text "GND" at 80.01,92.18 h2.5
  text "www.uzra.ir" at 131.699,89.154 h3.2 r90
  text "nRF24L01+" at 66.675,68.834 h3.5 r270
  text "Designed By:" at 34.33,57.699 h3
  text "Meysam Parvizi" at 34.23,54.016 h4
  text "http://mp.tabin.ir" at 34.33,50.587 h2.5
  text "University of Zanjan Robotics Association" at 98.425,29.845 h4
  text "Shahrivar, 1394" at 131.699,27.94 h3.5 r90
  text "+3V3" at 84.836,12.647 h2.5 r90
  text "SCL" at 87.376,12.647 h2.5 r90
  text "SDA" at 89.916,12.647 h2.5 r90
  text "GND" at 92.456,12.647 h2.5 r90
  text "+3V3" at 44.069,12.393 h2.5 r90
  text "RX" at 46.609,12.393 h2.5 r90
  text "TX" at 49.149,12.393 h2.5 r90
  text "GND" at 51.689,12.393 h2.5 r90
Mechanical 1:
  the board outline again, w0.254